# Altium PCB Beanbag.PcbDoc
Units mil, origin at the board's own origin, x right, y up, seen from the top; angles counter-clockwise.
Board outline 2060.03 x 1675.03 mil, 2 copper layers (Top Layer, Bottom Layer); 34 components, 21 nets, 104 pads, 29 vias.
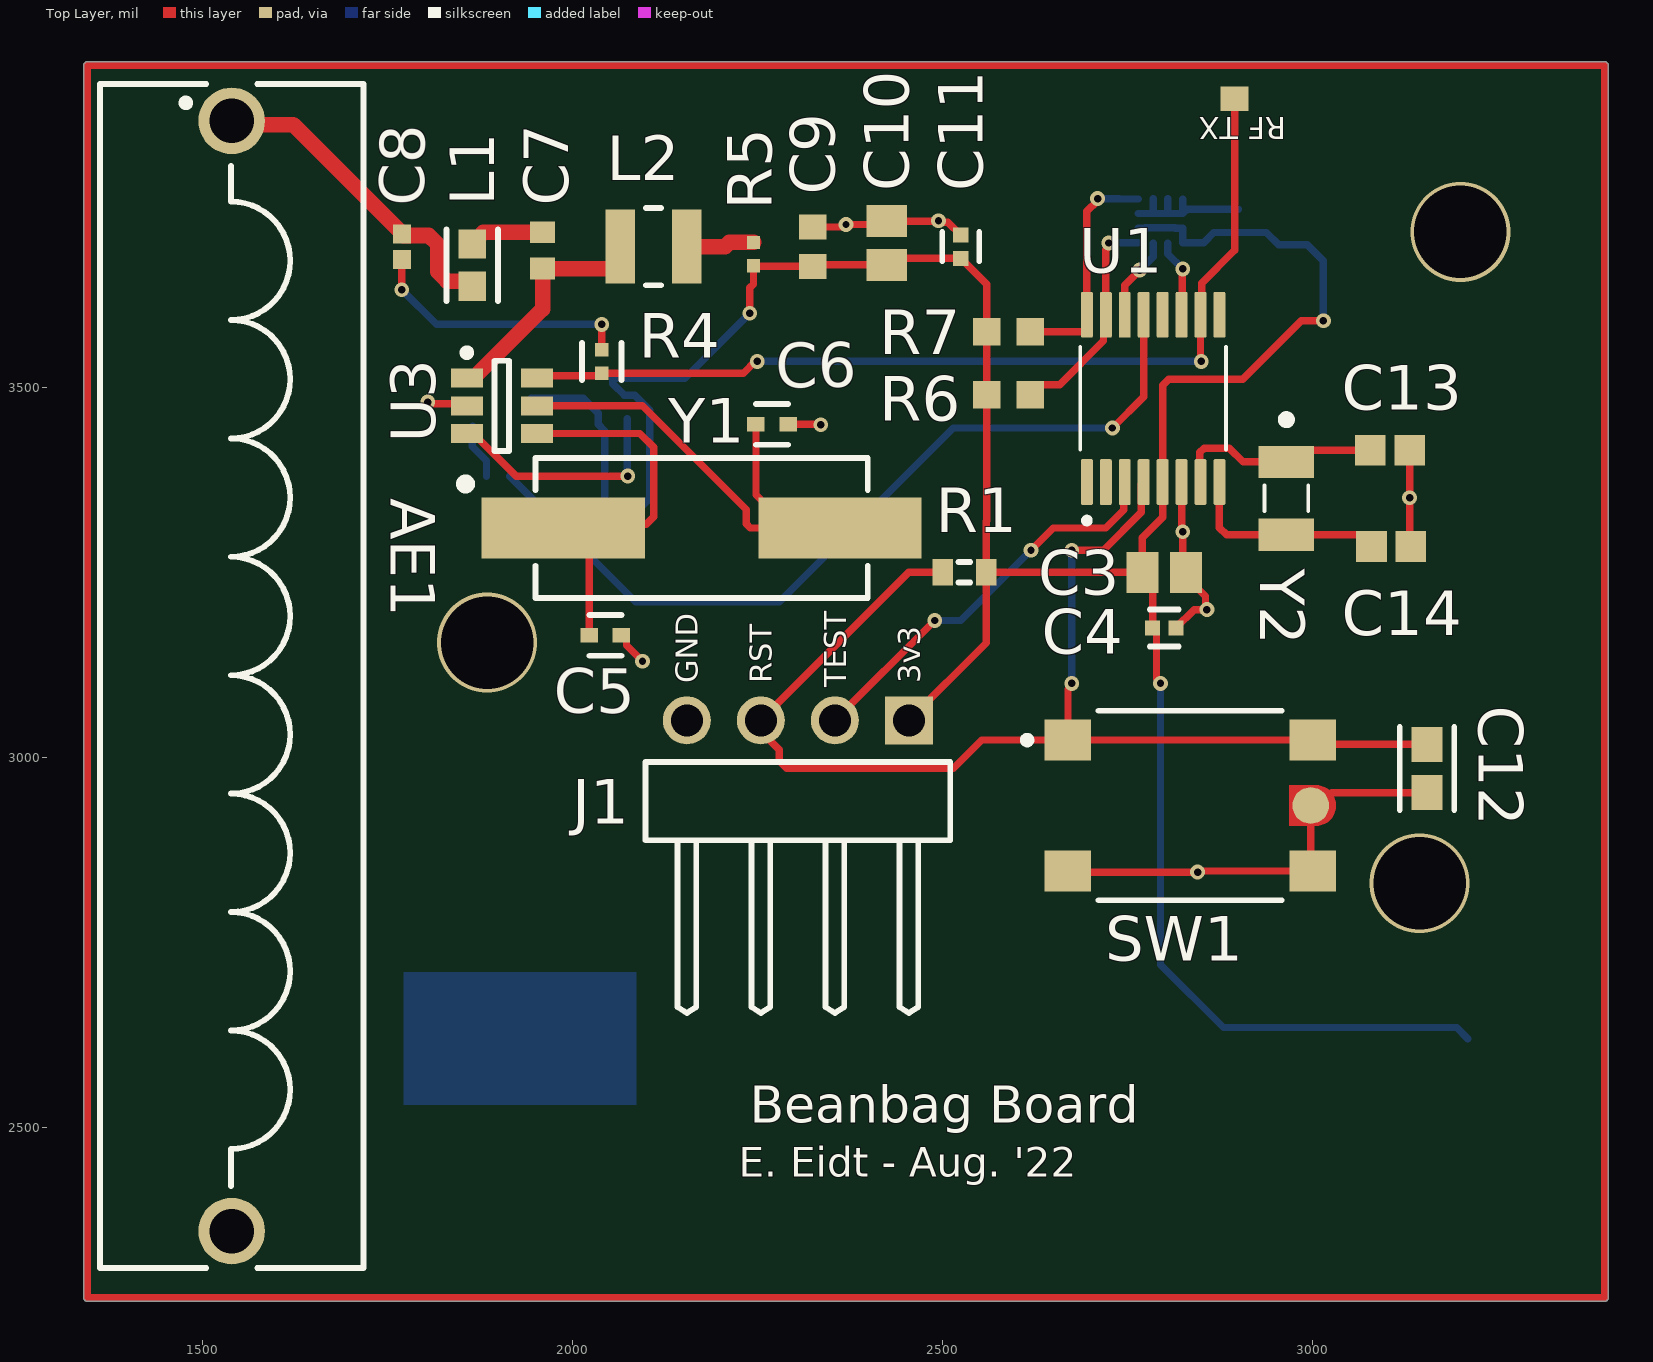
[diagram p0: Top Layer view]
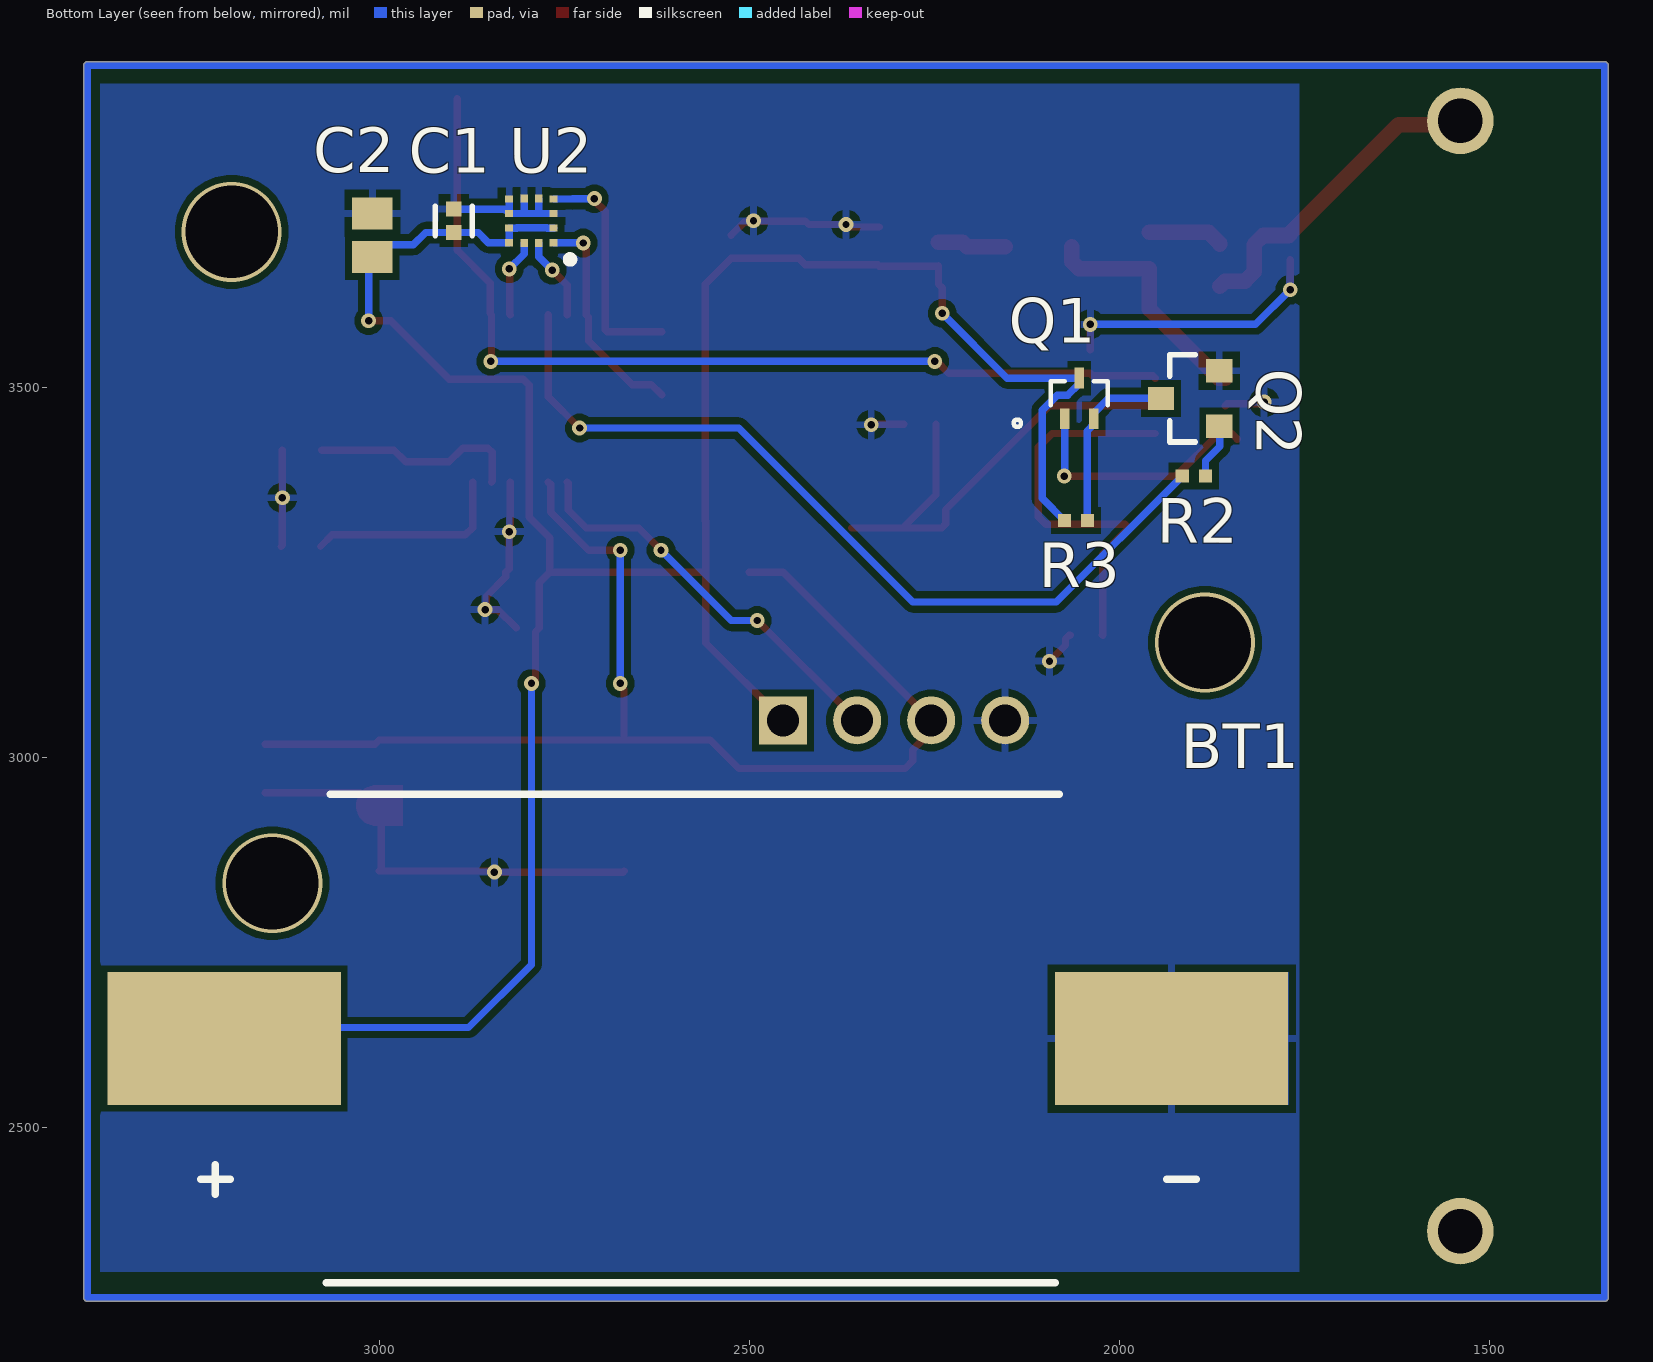
[diagram p1: Bottom Layer view, seen from below]
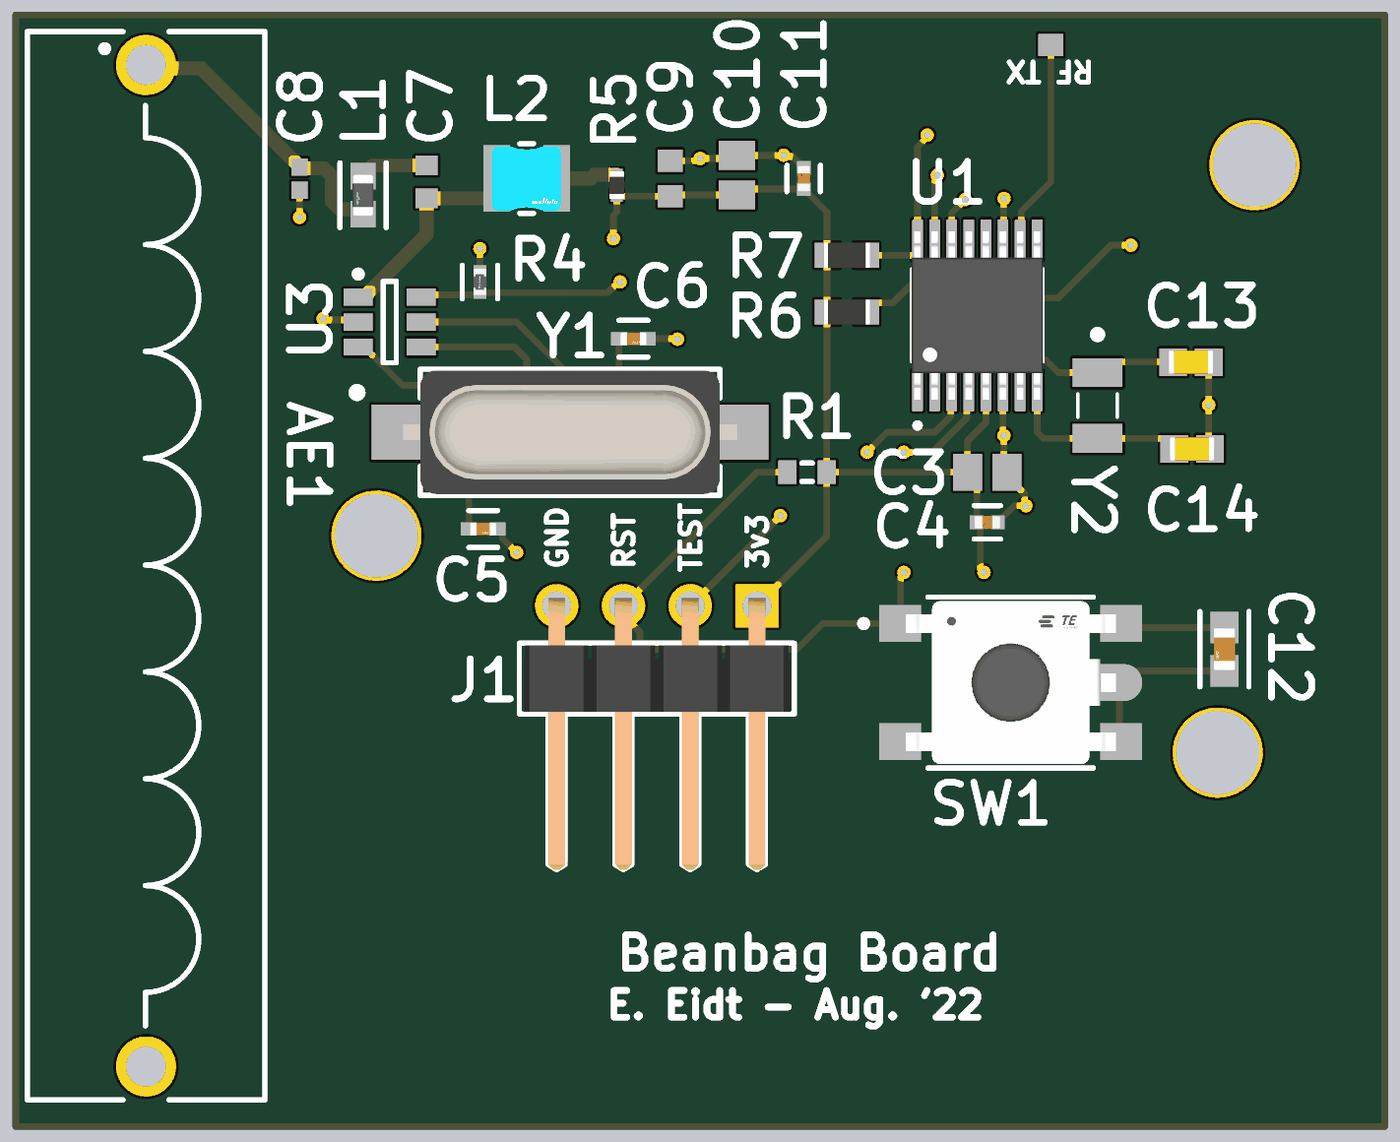
[diagram p2: 3D render of the assembled board from above, using the file's embedded part models]
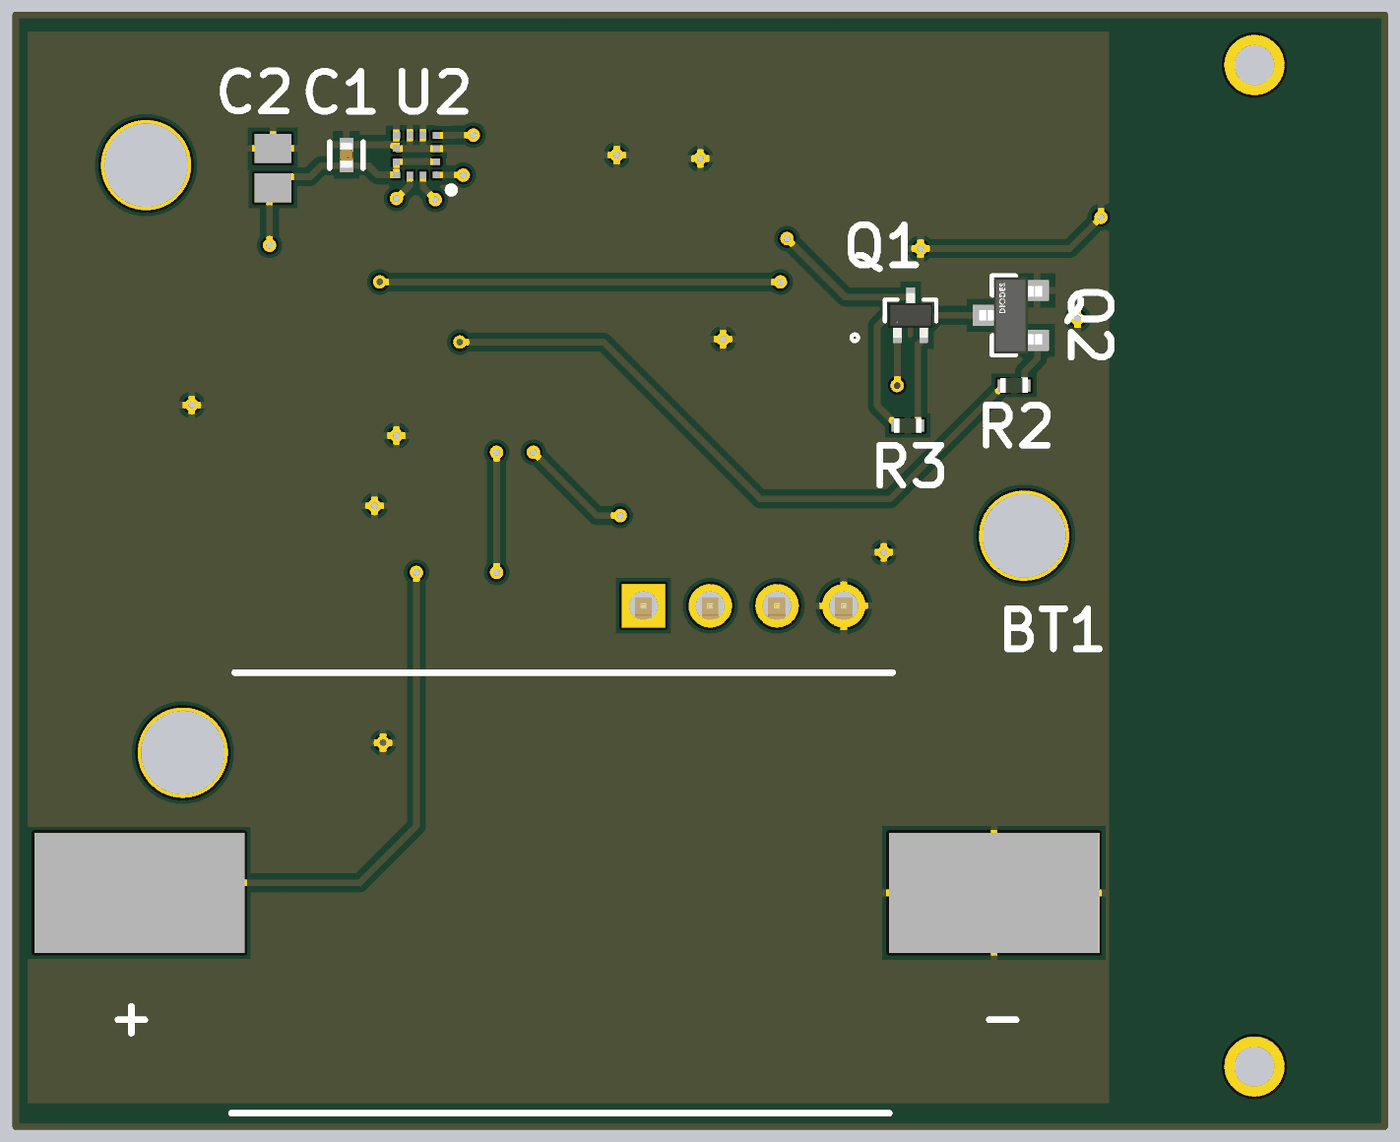
[diagram p3: 3D render of the assembled board from below, using the file's embedded part models]

## Layer stack, top to bottom
Top Solder: solder mask 0.4, Solder Resist, Dk 3.5
Top Layer: signal copper 1.4
Dielectric 1: dielectric 12.6, FR-4, Dk 4.8
Bottom Layer: signal copper 1.4
Bottom Solder: solder mask 0.4, Solder Resist, Dk 3.5

## Board outline
1345,2264.99 cw(c1345,2270) 1339.98,2270 1339.98,3935 cw(c1345,3935) 1345,3940.01 3395,3940.01 cw(c3395,3935) 3400.01,3935 3400.01,2270 cw(c3395,2270) 3395,2264.99

## Design rules (kind name [scope] priority, off if disabled: settings)
Clearance Clearance_1 [InNamedPolygon('GND_L02_P003')] p1: gap=5 ignorepadtopadclearanceinfootprint=FALSE except(0: Arc-Hole Track-Hole SMDPad-Hole THPad-Hole Via-Hole Fill-Hole Poly-Hole Region-Hole Text-Hole)
Clearance [All] p2: gap=9 ignorepadtopadclearanceinfootprint=FALSE except(0: Arc-Hole Track-Hole SMDPad-Hole THPad-Hole Via-Hole Fill-Hole Poly-Hole Region-Hole Text-Hole; 5: SMDPad-SMDPad; 10: Arc-Text Track-Text SMDPad-Text THPad-Text Via-Text Fill-Text Poly-Text Region-Text Text-Text)
MinimumSolderMaskSliver [All] p1: minsoldermaskwidth=0.5
PolygonConnect [All] p1: connectstyle=Relief reliefconductorwidth=10 reliefentries=4 polygonreliefangle="90 Angle" airgapwidth=10
RoutingVias [All] p1: holewidth=10 width=20 viastyle="Through Hole" minholewidth=8 minwidth=20 maxholewidth=28 maxwidth=50
SilkToSolderMaskClearance [IsPad] p1: minsilkscreentomaskgap=3 clearancetoexposedcopper=TRUE
SolderMaskExpansion [All] p1: expansion=4 istentingtop=FALSE
Width [InNetClass('RF')] p1: maxlimit=21.05 minlimit=21.05 preferedwidth=21.05 impedanceprofiledriven=TRUE impedanceprofileid={5821D3D1-2B05-429E-8024-41621388E1F3} impedanceprofilevalue=50.000000 minimp=50.000000 maximp=50.000000 favimp=50.000000
28 further rules are at their usual default settings.

## Classes and differential pairs
component class Radio: AE1 C5 C6 C7 C8 C9 C10 C11 L1 L2 Q1 Q2 R2 R3 R4 R5 U3
component class Power: BT1
component class Micro: C3 C4 C12 C13 C14 R1 SW1 U1 Y2
component class Connectors: J1
component class Accelerometer: C1 C2 R6 R7 U2

## Components (designator, comment, footprint, x,y, rotation, side; value= is the part's Value field where it differs from the comment)
AE1 "ANT-315-HETH" ANT-xxx-HETH 1540,3860 r270 top
BT1 "CR2032 Battery" PCBComponent_1 3367,2935 r180 bottom
C1 "100nF" FP-C0402-BB-MFG 2900,3725 r270 bottom value="0.10 μF"
C2 "10uF" C0805 3010,3705.47 r90 bottom
C3 "10uF" C0805 2800,3250 r0 top
C4 "100nF" FP-C0402-BB-MFG 2800,3175 r180 top value="0.10 μF"
C5 "18pF" FP-0402-L_1_0_1-W_0_5_0_1-MFG 2045,3165 r0 top
C6 "18pF" FP-0402-L_1_0_1-W_0_5_0_1-MFG 2270,3450 r0 top
C7 "10pF 50V" CAPC1608X90X35LL10T15 1960,3685 r90 top
C8 "6.8pF" CAPC1005X55X25NL05T10 1770,3690 r90 top
C9 "100pF" CAPC1608X90X35NL10T15 2325,3690 r270 top
C10 "10uF" C0805 2425,3695 r90 top
C11 "100nF" FP-C0402-BB-MFG 2525,3690 r90 top value="0.10 μF"
C12 "1nF" FP-0603-L_1_6_0_15-W_0_81-IPC_A 3155,2985 r270 top
C13 "10pF" CAPC1608X90X40ML10T20 3105,3415 r180 top
C14 "10pF" CAPC1608X90X40ML10T20 3106.57,3285 r180 top
J1 "61300411021" 61300411021 2305,2940.94 r0 top
L1 "150nH" FP-LQM18NN_00-IPC_B 1865,3665 r270 top
L2 "470nH" FP-LQW2UAS_00-MFG 2110,3690 r0 top
Q1 "MOSFET-P" SC89-3_0P95X1P7_ONS 2055,3485 r180 bottom
Q2 "FMMT491TA" FP-SOT23-MFG 1905,3485 r0 bottom
R1 "47K" J1-0603 2530,3250 r0 top
R2 "10K" RESC1005X40X25LL05T05 1900,3380 r180 bottom
R3 "10K" RESC1005X40X25LL05T05 2059.25,3320 r0 bottom
R4 "100K" FP-ERJ2RK-IPC_C 2040,3535 r90 top
R5 "0" RESC1005X40X25LL05T05 2245,3680 r270 top
R6 "4.7k" RESC1608X55X30NL15T15 2589.53,3490 r180 top
R7 "4.7k" RESC1608X55X30NL15T15 2589.53,3575 r180 top
SW1 "FSM1LP" FP-FSM1LP-MFG 2835,2935 r0 top
U1 "MSP430FR2311IPW16" SOP65P640X120-16N 2785,3485 r90 top
U2 "LIS2HH12TR" STM-LGA-12 2795,3725 r0 bottom
U3 "MICRF113YM6-TR" SOT23-6_N 1905,3475 r0 top
Y1 "9.8304MHZ" HC/49US-(AT49)_1 2175,3310 r0 top
Y2 "32kHz" XTAL_ECS-.327-6-34RR-TR 2965,3350 r270 top

## Footprints (in the part's own frame and the unit in brackets; to place one, negate y for a bottom-side part, rotate by r counter-clockwise, add the part's x,y. Pads: shape width x height; smd on the part's side, far side on the other; paste and mask are expansions set on the pad)
61300411021 [mm] "Pin Header, pitch 2.54 mm, THT, Angled, single row, 4p"
  rect 1.65x1.65 hole 1.1: 1(3.81,2.77)
  round 1.65 hole 1.1: 2(1.27,2.77) 3(-1.27,2.77) 4(-3.81,2.77)
  silkscreen extent -5.23,-7.27 5.23,1.35, body extent -5.08,-7.27 5.08,3.09, height 2.58
ANT-xxx-HETH [mil] "Antenna, Helical, 2-Lead, Thru-Hole, Body 1.5\"x0.35\""
  round 90 hole 60: 1(0,0) 2(1500,0)
  silkscreen extent -50,-178 1550,178, body extent 0,-175 1500,175, height 349
C0805 [mm] "Chip Capacitor, Body 2.0x1.3mm, IPC High Density"
  rect 1.1x1.4 smd: 1(-0.75,0) 2(0.75,0)
  body extent -1.1,-0.72 1.1,0.72, height 1.4
CAPC1005X55X25NL05T10 [mm] "Chip Capacitor, 2-Leads, Body 1.00x0.50mm, IPC Medium Density"
  rect 0.66x0.62 smd: 1(-0.44,0) 2(0.44,0)
  body extent -0.53,-0.28 0.53,0.27, height 0.55
CAPC1608X90X35LL10T15 [mm] "Chip Capacitor, 2-Leads, Body 1.60x0.80mm, IPC High Density"
  rect 0.75x0.85 smd: 1(-0.625,0) 2(0.625,0)
  body extent -0.85,-0.45 0.85,0.45, height 0.9
CAPC1608X90X35NL10T15 [mm] "Chip Capacitor, 2-Leads, Body 1.60x0.80mm, IPC Medium Density"
  rect 0.85x0.95 smd: 1(-0.675,0) 2(0.675,0)
  body extent -0.85,-0.45 0.85,0.45, height 0.9
CAPC1608X90X40ML10T20 [mm] "Chip Capacitor, 2-Leads, Body 1.7x0.9mm, IPC Low Density"
  rect 1.05x1.05 smd: 1(-0.675,0) 2(0.675,0)
  body extent -0.85,-0.45 0.85,0.45, height 0.9
FP-0402-L_1_0_1-W_0_5_0_1-MFG [mm]
  rect 0.6x0.5 smd paste+0 mask+0: 1(-0.55,0) 2(0.55,0)
  silkscreen extent -0.55,-0.7 0.55,0.7, body extent -0.95,-0.4 0.95,0.4, height 0.25
FP-0603-L_1_6_0_15-W_0_81-IPC_A [mil]
  rect 47.5x42.06 smd paste+0 mask+0: 1(-32.51,0) 2(32.51,0)
  silkscreen extent -56,-37 56,37, body extent -76,-41 76,41, height 10
FP-C0402-BB-MFG [mm]
  rect 0.52x0.52 smd paste+0 mask+0: 1(-0.4,0) 2(0.4,0)
  silkscreen extent -0.5,-0.64 0.5,0.64, body extent -0.5,-0.25 0.5,0.25, height 0.55
FP-ERJ2RK-IPC_C [mil]
  rect 18.43x18.6 smd paste+0 mask+0: 1(-15.83,0) 2(15.83,0)
  silkscreen extent -25,-27 25,27, body extent -29,-15 29,15, height 10
FP-FSM1LP-MFG [mm]
  rect 1.6x1.395 smd paste+0 mask+0: 1(-4.205,2.247) 2(4.205,2.247) 3(-4.205,-2.247) 4(4.205,-2.247)
  round 1.26 smd paste+0 mask+0: 5(4.139,0)
  Top Layer region: 3.405,0.7 4.307,0.7 4.574,0.647 4.801,0.496 4.952,0.269 5.005,0.002 5.005,0.002 5.005,-0.002 4.952,-0.269 4.801,-0.496 4.574,-0.647 4.307,-0.7 4.307,-0.7 3.405,-0.7
  silkscreen extent -5.72,-3.25 3.14,3.25, body extent -5.1,-3.35 5.11,3.35, height 0.25
FP-LQM18NN_00-IPC_B [mil]
  rect 39.63x37.73 smd paste+0 mask+0: 1(-28.58,0) 2(28.58,0)
  silkscreen extent -48,-35 48,35, body extent -58,-29 58,29, height 10
FP-LQW2UAS_00-MFG [mm]
  rect 1.015x2.54 smd paste+0 mask+0: 1(-1.142,0) 2(1.142,0)
  silkscreen extent -0.26,-1.33 0.26,1.33, body extent -1.75,-1.43 1.75,1.43, height 0.25
FP-SOT23-MFG [mm]
  rect 0.9x0.8 smd paste+0 mask+0: 1(-1,0.95) 2(-1,-0.95) 3(1,0)
  silkscreen extent -0.18,-1.5 0.7,1.5, body extent -1.2,-1.45 1.2,1.45, height 1.1
HC/49US-(AT49)_1 [mm]
  rect 5.6x2.1 smd: 1(-4.75,0) 2(4.75,0)
  silkscreen extent -8.23,-2.4 5.7,2.4, body extent -6.35,-2.35 6.35,2.35, height 4.2
J1-0603 [mm] "Chip Resistor, Body 1.6x0.8mm, IPC High Density"
  rect 0.7x0.9 smd: 1(-0.75,0) 2(0.75,0)
  silkscreen extent -0.2,-0.35 0.2,0.35, body extent -0.85,-0.48 0.85,0.48, height 0.9
PCBComponent_1 [mil]
  rect 315x180 smd: +(157,-315) -(1437,-315)
  Top Layer region: 1280,-225 1595,-225 1595,-405 1280,-405
  silkscreen extent 125,-645 1470,15
RESC1005X40X25LL05T05 [mm] "Chip Resistor, 2-Leads, Body 1.05x0.55mm, IPC High Density"
  rect 0.45x0.45 smd: 1(-0.4,0) 2(0.4,0)
  body extent -0.53,-0.28 0.53,0.28, height 0.4
RESC1608X55X30NL15T15 [mm] "Chip Resistor, 2-Leads, Body 1.75x0.95mm, IPC Medium Density"
  rect 0.95x0.95 smd: 1(-0.75,0) 2(0.75,0)
  body extent -0.87,-0.48 0.87,0.48, height 0.55
SC89-3_0P95X1P7_ONS [mil]
  rect 13x28 smd paste+0 mask+0: 1(-19.69,-27.5) 2(19.68,-27.5) 3(0,27.5)
  silkscreen extent -88,-38 38,24, body extent -34,-34 34,34, height 34
SOP65P640X120-16N [mm]
  rrect25% 1.57x0.41 smd: 1(-2.87,2.275) 2(-2.87,1.625) 3(-2.87,0.975) 4(-2.87,0.325) 5(-2.87,-0.325) 6(-2.87,-0.975) 7(-2.87,-1.625) 8(-2.87,-2.275) 9(2.87,-2.275) 10(2.87,-1.625) 11(2.87,-0.975) 12(2.87,-0.325) 13(2.87,0.325) 14(2.87,0.975) 15(2.87,1.625) 16(2.87,2.275)
  silkscreen extent -4.29,-2.5 1.76,2.5, body extent -3.2,-2.5 3.2,2.5, height 1.2
SOT23-6_N [mm] "SOT23, 6-Leads, Body 2.9x1.6mm, Pitch 0.95mm, Lead Span 2.7mm, IPC Medium Density"
  rect 1.1x0.65 smd: 1(-1.2,0.95) 2(-1.2,0) 3(-1.2,-0.95) 4(1.2,-0.95) 5(1.2,0) 6(1.2,0.95)
  silkscreen extent -1.32,-1.55 0.25,1.95, body extent -0.9,-1.55 0.9,1.55, height 1.45
STM-LGA-12 [mm] "LGA, 12-Leads, Body 2x2mm, Pitch 0.5mm"
  rect 0.275x0.25 smd: 1(-0.763,0.75) 2(-0.763,0.25) 3(-0.763,-0.25) 4(-0.763,-0.75) 7(0.763,-0.75) 8(0.763,-0.25) 9(0.763,0.25) 10(0.763,0.75)
  rect 0.25x0.275 smd: 5(-0.25,-0.763) 6(0.25,-0.763) 11(0.25,0.763) 12(-0.25,0.763)
  silkscreen extent -1.45,1.2 -1.2,1.45, body extent -1,-1 1,1, height 1
XTAL_ECS-.327-6-34RR-TR [mm]
  rect 1.1x1.9 smd: 1(-1.25,0) 2(1.25,0)
  silkscreen extent -2.84,-0.75 0.44,0.75

## Part data
AE1: library part CMP-0172-00019-1, "Embeddable 1/4-wave Monopole Antenna, HE Series, 315MHz, Thru-Hole", DatasheetVersion=Feb-2002, PackageDescription="Helical Antenna, HE Series, Thru-Hole, 2-Lead, 1.5\" x 0.35\" Body", PackageReference=ANT-xxx-HETH, PackageVersion=Feb-2002
BT1: library part Battery, "Multicell Battery", Supplier Part Number 1=2057-BH-49E-5-BK-ND, LatestRevisionDate=17-Jul-2002, LatestRevisionNote="Re-released for DXP Platform.", PackageDescription="Battery; 2 Leads", PackageReference=BAT-2, Published=24-Mar-1999, Publisher="Altium Limited", Supplier 1=Digi-Key
C1 C4 C11: library part CMP-2008-02046-2, "CAP CER 0.1UF 10V X5R 0402", Capacitance="0.10 μF", Manufacturer=Kemet, Manufacturer Part Number=C0402C104K8PACTU, Package=C0402-BB, Temperature="-55°C to +125°C", Temperature Characteristic=X5R, Temperature Coefficient=15%, Temperature Range High=+125°C, Temperature Range Low=-55°C, Tolerance=0.1, Voltage Rating="10 V", Automotive=No, Category=Cap, ComponentLink2Description=Datasheet, ComponentLink2URL=https://content.kemet.com/datasheets/KEM_C1002_X7R_SMD.pdf, Device Class L1="Passive Components", Device Class L2=Capacitors, Device Class L3="Ceramic Capacitors", Digikey Description="CAP CER 0.1UF 10V X5R 0402", Height=0.55mm, Ipc Land Pattern Name=CAPC10050X50, Lead Free=Yes, Material=Ceramic, Mouser Description="Capacitor 100 nF 10 VDC 0402", Octopart=https://octopart.com/c0402c104k8pactu-kemet-140039, RoHS=TRUE
C2 C3 C10: library part "Cap Pol3", "Alum. Electrolytic Cap 10µF 50V; 5mm Surface Mount; Lifetime 2000h; +105°C", Case/Package=Radial, Manufacturer="Wurth Electronics", Manufacturer Part Number=865080642006, Max Operating Temperature=105°C, Min Operating Temperature=-55°C, Package Quantity=1, Ripple Current=95mA, Supplier Part Number 1=8391862P, Tolerance=20%, Voltage Rating=50V, Capacitance=10uF, Category="Aluminum Electrolytic Capacitors", ComponentLink1Description=http://www.farnell.com/datasheets/1880176.pdf?src-supplier=Farnell, ComponentLink1URL=http://www.farnell.com/datasheets/1880176.pdf?src-supplier=Farnell, ComponentLink2Description=http://www.farnell.com/datasheets/1880176.pdf?src-supplier=Element14, ComponentLink2URL=http://www.farnell.com/datasheets/1880176.pdf?src-supplier=Element14, ComponentLink3Description=http://www.farnell.com/datasheets/1880176.pdf?src-supplier=Newark, ComponentLink3URL=http://www.farnell.com/datasheets/1880176.pdf?src-supplier=Newark, ComponentLink4Description=http://katalog.we-online.de/pbs/datasheet/865080642006.pdf?src-supplier=Digi-Key, ComponentLink4URL=http://katalog.we-online.de/pbs/datasheet/865080642006.pdf?src-supplier=Digi-Key, ComponentLink5Description=https://katalog.we-online.de/pbs/datasheet/865080642006.pdf?src-supplier=Digi-Key, ComponentLink5URL=https://katalog.we-online.de/pbs/datasheet/865080642006.pdf?src-supplier=Digi-Key, Diameter=5mm, Height=5.5mm, Height - Seated (Max)=0.217inch, Impedance=2.8R, LatestRevisionDate=29-May-2009, LatestRevisionNote="IPC-7351 Footprint Added.", Life (Hours)=2000Hour, Mount="Surface Mount", PackageDescription="Chip Capacitor", PackageReference=C0805, Packaging="Cut Tape", Polarity=Polar, Pricing 1="25=0.20400 (USD)", Published=8-Jun-2000, Publisher="Altium Limited", REACH SVHC=Unknown, Ripple Current (AC)=95mA, RoHS=Yes, RoHS Compliant=Yes, Stock 1=1, Supplier 1=RSComponents, Voltage Rating (DC)=50V
C5 C6: library part CMP-1034-00865-3, "General Purpose Ceramic Capacitor, 0402, 18pF, 5%, C0G, 30ppm/°C, 50V", Case Code (Imperial)=0402, Case Code (Metric)=1005, Dielectric=C0G, Dielectric Material=Ceramic, Insulation Resistance=100GR, Max Operating Temperature=125°C, Min Operating Temperature=-55°C, Package Quantity=1, Temperature Coefficient=0ppm/°C, Tolerance=5%, Voltage=50V, Capacitance=18pF, Case/Package=0402, Contact Plating=Tin, Depth=0.5mm, Height=0.5mm, Lead Free="Lead Free", Length=1mm, Mount="Surface Mount", Number of Pins=2, Packaging="Tape and Reel", Radiation Hardening=No, REACH SVHC="No SVHC", RoHS Compliant=Yes, Termination=SMD/SMT, Thickness=0.022inch, Voltage Rating=50V, Voltage Rating (DC)=50V, Width=0.02inch
C7: library part CMP-2006-02592-1, Manufacturer=Murata, Part Number=GRM1885C1H100JA01D, Supplier Part Number 1=490-1403-1-ND, Supplier 1=Digi-Key
C8: library part CMP-2008-04424-1, Manufacturer=Murata, Part Number=GRM1555C1H6R8DA01D
C9: library part CMP-2006-02595-1, Manufacturer=Murata, Part Number=GRM1885C1H101JA01D, Supplier Part Number 1=490-1427-6-ND, Supplier 1=Digi-Key
C12: library part CMP-2006-04378-2, "General Purpose Ceramic Capacitor, 0603, 1nF, 10%, X7R, 15%, 50V", Case Code (Imperial)=0603, Case Code (Metric)=1608, Dielectric=X7R, Dielectric Material=Ceramic, Max Operating Temperature=125°C, Min Operating Temperature=-55°C, Package Quantity=4000, Supplier Part Number 1=06035C102KAT2A, Tolerance=10%, Voltage=50V, Capacitance=1nF, Case/Package=0603, Construction=Flat, Contact Plating=Tin, Depth=0.81mm, Height=0.9mm, Lead Free="Lead Free", Length=1.6mm, Mount="Surface Mount", Number of Pins=2, Packaging="Tape and Reel", Radiation Hardening=No, REACH SVHC="No SVHC", RoHS Compliant=Yes, Series=-, Supplier 1="Arrow Electronics", Termination=SMD/SMT, Thickness=0.035inch, Voltage Rating=50V, Voltage Rating (DC)=50V, Weight=7.1E-05oz, Width=0.032inch
C13 C14: library part CMP-2100-03593-1, "Chip Capacitor, 10 pF, +/- 5%, 50 V, -55 to 125 degC, 0603 (1608 Metric), RoHS, Tape and Reel", Case Code (Imperial)=0603, Case Code (Metric)=1608, Dielectric=C0G, Insulation Resistance=100GR, Manufacturer=Yageo, Max Operating Temperature=125degC, Min Operating Temperature=-55degC, Package Description="2-Pin Surface Mount Device, Body 1.6 x 0.8 mm", Package Quantity=1, Supplier Part Number 1=CC0603JRNPO9BN100, Temperature Coefficient=30ppm/degC, Tolerance=5%, Voltage=50V, Capacitance=10pF, Case/Package=0603, Composition=Ceramic, Datasheet URL=http://www.yageo.com/documents/recent/UPY-GP_NP0_16V-to-50V_14.pdf, Datasheet Version="Rev. 14, 07/2016", Depth=0.8mm, Height=0.8mm, Lead Free=LeadFree, Length=1.6mm, Manufacturer URL=http://www.yageo.com/, Mount=SurfaceMount, Number of Pins=2, Package Reference=0603, Packaging=TapeandReel, Radiation Hardening=No, REACH SVHC=NoSVHC, RoHSCompliant=True, Supplier 1="Arrow Electronics", Termination=SMD/SMT, Thickness=0.035inch, Voltage Rating=50V, Voltage Rating (DC)=50V, Width=0.031inch
J1: library part CMP-1502-01063-1, "THT Angled Pin Header WR-PHD, Pitch 2.54 mm, Single Row, 4 pins", Contact Resistance=20mOhm, Manufacturer="Wurth Elektronik", Operating Temperature=-40to105degC, Rated Current=3A, Withstanding Voltage=500VAC, Working Voltage=250VAC, Datasheet URL=https://katalog.we-online.de/em/datasheet/6130xx11021.pdf, Gender=Male, Manufacturer URL=http://www.we-online.de, Mounting Technology=THT, Orientation=Angled, Package Reference=61300411021, Packaging=Bag, Part Number=61300411021, Pin Number=4, Pitch=2.54mm, Publisher=WurthElektronik, Row Number=Single
L1: library part CMP-06042-016466-1, "Multilayer Type Inductor for General Circuits, 0603 (1608), 150nH, 10%, 0.6Ω, 50mA", Case Code (Imperial)=0603, Case Code (Metric)=1608, Current Rating=50mA, DC Resistance (DCR)=600mR, Inductance Tolerance=10%, Inductor Type=MONOLITHIC, Max Operating Temperature=85°C, Min Operating Temperature=-40°C, Package Quantity=4000, Self Resonant Frequency=180MHz, Supplier Part Number 1=490-4033-1-ND, Test Frequency=25MHz, Case/Package=0603, Core Material=Ferrite, DC Current=50mA, Depth=0.95mm, Height=0.8mm, Height - Seated (Max)=0.035inch, Inductance=150nH, Lead Free="Lead Free", Length=1.6mm, Max DC Current=50mA, Military Standard=Not, Mount="Surface Mount", Number of Pins=2, Packaging="Tape and Reel", Q Factor=15, REACH SVHC="No SVHC", Series=LQM18N, Shielding=Shielded, Supplier 1=Digi-Key, Termination=SMD/SMT, Tolerance=10%, Width=0.8mm
L2: library part CMP-06042-015512-1, "Wire Wound RF Inductor 470nH ±5% 470mA 1.19Ω 1008 (2520)", Case Code (Imperial)=1008, Case Code (Metric)=2520, Current Rating=470mA, DC Resistance (DCR)=1.19R, Inductance Tolerance=5%, Max Operating Temperature=125°C, Min Operating Temperature=-55°C, Package Quantity=2000, Resistor Type=Wirewound, Self Resonant Frequency=450MHz, Supplier Part Number 1=490-5699-6-ND, Test Frequency=25MHz, Case/Package=1008, Core Material=Air, Depth=2.65mm, Height=1.83mm, Height - Seated (Max)=0.08inch, Inductance=470nH, Lead Free="Lead Free", Length=0.103inch, Max DC Current=470mA, Mount="Surface Mount", Packaging="Tape and Reel", Q Factor=45, Radiation Hardening=No, REACH SVHC="No SVHC", Series=LQW2UA, Shielding=Unshielded, Supplier 1=Digi-Key, Termination=SMD/SMT, Tolerance=5%, Weight=0.001376oz, Width=0.096inch
Q1: "Single P-Channel 20 V 1.2 Ohm Surface Mount Power Mosfet - SC-89", Case/Package=SC, Continuous Drain Current (ID)=350mA, Drain to Source Breakdown Voltage=-20V, Drain to Source Resistance=1.2R, Drain to Source Voltage (Vdss)=20V, Gate to Source Voltage (Vgs)=6V, Manufacturer="Vishay Siliconix", Manufacturer Part Number=SI1013X-T1-GE3, Max Operating Temperature=150°C, Max Power Dissipation=250mW, Min Operating Temperature=-55°C, Package Quantity=1, Supplier Part Number 1=SI1013X-T1-GE3CT-ND, Threshold Voltage=-450mV, Category=MOSFETs, ComponentLink1Description=https://datasheet.ciiva.com/22671/1825082-22671731.pdf?src-supplier=Element14, ComponentLink1URL=https://datasheet.ciiva.com/22671/1825082-22671731.pdf?src-supplier=Element14, ComponentLink2Description=https://datasheet.ciiva.com/931/71167-931890.pdf?src-supplier=Digi-Key, ComponentLink2URL=https://datasheet.ciiva.com/931/71167-931890.pdf?src-supplier=Digi-Key, ComponentLink3Description=https://datasheet.ciiva.com/931/71167-931891.pdf?src-supplier=Digi-Key, ComponentLink3URL=https://datasheet.ciiva.com/931/71167-931891.pdf?src-supplier=Digi-Key, ComponentLink4Description=https://datasheet.ciiva.com/931/71167-931892.pdf?src-supplier=Digi-Key, ComponentLink4URL=https://datasheet.ciiva.com/931/71167-931892.pdf?src-supplier=Digi-Key, ComponentLink5Description=https://datasheet.ciiva.com/11161/71167-11161420.pdf?src-supplier=Avnet, ComponentLink5URL=https://datasheet.ciiva.com/11161/71167-11161420.pdf?src-supplier=Avnet, ComponentLink6Description=https://datasheet.ciiva.com/16217/71167-16217575.pdf?src-supplier=Future+Electronics, ComponentLink6URL=https://datasheet.ciiva.com/16217/71167-16217575.pdf?src-supplier=Future+Electronics, Drain-source On Resistance-Max=1.2R, Element Configuration=Single, Fall Time=9ns, Height=0.8mm, LatestRevisionDate=17-Jul-2002, LatestRevisionNote="Re-released for DXP Platform.", Lead Free="Lead Free", Length=1.7mm, Mount="Surface Mount", Number of Channels=1, Number of Elements=1, Number of Pins=3, On-State Resistance=1.2R, PackageDescription="TO, Flat Index; 3 In-Line, Axial Leads; Body Dia. 4.6mm; Lead Dia. 0.5 mm (max)", PackageReference=E3, PackageVersion=1995/1996, Packaging="Tape and Reel", Polarity=P-CHANNEL, Power Dissipation=250mW, Pricing 1="1=0.46000, 10=0.39200, 100=0.29260, 500=0.22990, 1000=0.17765 (USD)", Published=8-Jun-2000, Publisher="Altium Limited", Radiation Hardening=No, Rds On Max=1.2R, REACH SVHC=Unknown, Rise Time=9ns, RoHS=Yes, RoHS Compliant=Yes, Series=TrenchFET®, Stock 1=2646, Supplier 1=Digi-Key, Turn-Off Delay Time=35ns, Turn-On Delay Time=5ns, Weight=0.001058oz, Width=0.95mm
Q2: library part CMP-12798-000044-1, "TRANS NPN 60V 1A SOT23-3", Case/Package=SOT-23, Collector Base Voltage (VCBO)=80V, Collector Emitter Breakdown Voltage=60V, Collector Emitter Saturation Voltage=160mV, Continuous Collector Current=1A, Emitter Base Voltage (VEBO)=5V, Frequency=150MHz, Max Operating Temperature=150°C, Max Power Dissipation=500mW, Min Operating Temperature=-55°C, Package Quantity=3000, Supplier Part Number 1=0274879P, Collector Emitter Voltage (VCEO)=60V, Current Rating=1A, Element Configuration=Single, Gain Bandwidth Product=150MHz, Height=1.02mm, hFE Min=100, Lead Free="Lead Free", Length=3.04mm, Max Breakdown Voltage=60V, Max Collector Current=1A, Max Frequency=150MHz, Mount="Surface Mount", Number of Elements=1, Number of Pins=3, Packaging="Tape and Reel", Polarity=NPN, Power Dissipation=500mW, Radiation Hardening=No, REACH SVHC="No SVHC", Supplier 1=RSComponents, Termination=SMD/SMT, Transition Frequency=150MHz, Voltage Rating (DC)=60V, Weight=0.000282oz, Width=1.4mm
R1: library part Res1, "Resistor", LatestRevisionDate=17-Jul-2002, LatestRevisionNote="Re-released for DXP Platform.", PackageDescription="Axial Device, Thru-Hole; 2 Leads; 0.3 in Pin Spacing", PackageReference=AXIAL-0.3, Published=8-Jun-2000, Publisher="Altium Limited"
R2 R3: library part CMP-2000-07588-1, "Chip Resistor, 10 KOhm, +/- 1%, 0.1 W, -55 to 155 degC, 0402 (1005 Metric), RoHS, Tape and Reel", Case Code (Imperial)=0402, Case Code (Metric)=1005, Manufacturer=Panasonic, Max Operating Temperature=155degC, Max Power Dissipation=100mW, Min Operating Temperature=-55degC, Package Description="2-Pin Surface Mount Device, Body 1 x 0.5 mm", Package Quantity=1, Package Reference=402, Resistance=10KOhm, Temperature Coefficient=100ppm\/degreesC, Tolerance=1%, Voltage Rating=50V, Case\/Package=0402, Composition=ThickFilm, Contact Plating=Tin, Datasheet URL=https://industrial.panasonic.com/cdbs/www-data/pdf/RDA0000/AOA0000C304.pdf, Datasheet Version=02/2017, Depth=0.5mm, Height=0.35mm, Lead Free=LeadFree, Length=1mm, Manufacturer URL=http://www.panasonic.com/, Military Standard=Not, Mount=SurfaceMount, Mounting Technology=SurfaceMount, Number of Pins=2, Number of Terminations=2, Packaging=TapeandReel, Power Rating=100mW, Radiation Hardening=No, REACH SVHC=NoSVHC, RoHSCompliant=True, Termination=SMD/SMT, Voltage Rating (DC)=50V, Width=0.02inch
R4: library part CMP-2002-00608-4, "RES SMD 100K OHM 1% 1/10W 0402", Case Code (Imperial)=0402, Case Code (Metric)=1005, Max Operating Temperature=155°C, Max Power Dissipation=100mW, Min Operating Temperature=-55°C, Package Quantity=1, Resistance=100kR, Supplier Part Number 1=ERJ-2RKF1003X, Temperature Coefficient=100ppm/°C, Tolerance=1%, Voltage Rating=50V, Case/Package=0402, Composition="Thick Film", Contact Plating=Tin, Depth=0.5mm, Features="Automotive AEC-Q200", Height=0.35mm, Lead Free="Lead Free", Length=1mm, Military Standard=Not, Mount="Surface Mount", Number of Pins=2, Number of Terminations=2, Packaging="Tape and Reel", Power Rating=100mW, Radiation Hardening=No, REACH SVHC="No SVHC", Supplier 1="Arrow Electronics", Termination=SMD/SMT, Voltage Rating (DC)=50V, Width=0.5mm
R5: library part CMP-2000-07451-1, "Chip Resistor, 0 Ohm, 0.1 W, -55 to 155 degC, 0402 (1005 Metric), RoHS, Tape and Reel", Case Code (Imperial)=0402, Case Code (Metric)=1005, Manufacturer=Panasonic, Max Operating Temperature=155degC, Max Power Dissipation=100mW, Min Operating Temperature=-55degC, Package Description="2-Pin Surface Mount Device, Body 1 x 0.5 mm", Package Quantity=1, Package Reference=402, Resistance=0mOhm, Supplier Part Number 1=P0.0JCT-ND, Temperature Coefficient=600ppm/��C, Tolerance=5%, Voltage Rating=50V, Case/Package=0402, Composition=ThickFilm, Contact Plating=Tin, Datasheet URL=https://industrial.panasonic.com/cdbs/www-data/pdf/RDA0000/AOA0000C301.pdf, Datasheet Version=03/2015, Depth=0.5mm, Height=0.35mm, Lead Free=LeadFree, Length=1mm, Manufacturer URL=http://www.panasonic.com/, Military Standard=Not, Mount=SurfaceMount, Mounting Technology=SurfaceMount, Number of Terminations=2, Packaging=TapeandReel, Power Rating=100mW, Radiation Hardening=No, REACH SVHC=NoSVHC, RoHSCompliant=True, Supplier 1=Digi-Key, Termination=SMD/SMT, Voltage Rating (DC)=50V, Width=0.02inch
R6 R7: library part CMP-1012-00586-3, "Precision Thick Film Chip Resistor, 4.7 KOhm, +/- 1%, -55 to 155 degC, 0603 (1608 Metric), RoHS, Tape and Reel", Case Code (Imperial)=1206, Case Code (Metric)=3216, Case\Package=1205, Max Operating Temperature="125 degC", Min Operating Temperature="-55 degC", Package Quantity=1, Power Rating="250 mW", Resistance="220 Ohm", Supplier Part Number 1=P4.70KHCT-ND, Tolerance=5%, Type (Resistor)="Thick Film", Voltage Rating="50 V", ComponentLink1Description="Manufacturer URL", ComponentLink1URL=http://www.panasonic.com/, ComponentLink2Description=Datasheet, ComponentLink2URL=http://industrial.panasonic.com/cdbs/www-data/pdf/RDA0000/AOA0000C86.pdf, DatasheetVersion=Apr-15, Elements=4, Height="0.024 inch", Length="0.126 inch", Mount="Surface Mount", PackageDescription="2-Pin Surface Mount Device, Body 1.6 x 0.85 mm", PackageReference=0603, Packaging="Tape and Reel", Pins=8, Radiation Hardening=No, REACH SVHC="No SVHC", RoHSCompliant=true, Supplier 1=Digi-Key, Width="0.063 inch"
SW1: library part CMP-03402-000015-1, "SWITCH TACTILE SPST-NO 0.05A 24V", Actuator Color=Black, Contact Current Rating=50mA, Contact Resistance=100mR, Max Operating Temperature=85°C, Max Voltage Rating (DC)=12V, Min Operating Temperature=-35°C, Operating Force=1.57N, Package Quantity=2000, Actuator Length=0.01inch, Actuator Material=Polyphthalamide, Actuator Type=Standard, Contact Material="Copper Alloy", Contact Plating=Silver, Current Rating=50mA, Depth=8mm, Electrical Life=100000Cycles, ELV=Compliant, Illumination Type=Non-Illuminated, Lead Free="Lead Free", Length=6.19mm, Max Current Rating=50mA, Mechanical Life=100000Cycles, Mount="Surface Mount", Orientation=Straight, Packaging="Loose Piece", REACH SVHC="No SVHC", RoHS Compliant=Yes, Series=FSM1LP, Supplier 1="Arrow Electronics", Supplier Part Number 1=FSM1LP, Switch Function=Off-Mom, Switch Travel=0.25mm, Termination="Gull Wing", Throw Configuration=SPST, Type=Switch, Voltage Rating (DC)=12V
U1: "16MHz integrated analog microcontroller with 3.75KB FRAM, Op-Amp, TIA, Comparator w/ DAC, 10-bit ADC 16-TSSOP -40 to 85", Package="TSSOP-16 Texas Instruments", Availability="In Stock", Check_prices=https://www.snapeda.com/parts/MSP430FR2311IPW16/Texas+Instruments/view-part/?ref=eda, MF="Texas Instruments", MP=MSP430FR2311IPW16, Price=None, Purchase-URL=https://pricing.snapeda.com/search/part/MSP430FR2311IPW16/?ref=eda, SnapEDA_Link=https://www.snapeda.com/parts/MSP430FR2311IPW16/Texas+Instruments/view-part/?ref=snap
U2: library part CMP-2000-07462-1, "MEMS Digital Output Motion Sensor: Ultra-Low-Power High-Performance 3-Axis \"Pico\" Accelerometer, 1.71 to 3.6 V, -40 to 85 degC, 12-Pin LGA, RoHS, Tape and Reel", Case\/Package=LGA, Manufacturer=STMicroelectronics, Max Operating Temperature=85degC, Min Operating Temperature=-40degC, Package Description="12-Pin Land Grid Array Package, Body 2 x 2 mm, Pitch 0.5 mm", Package Reference=LGA-12, Bandwidth=400Hz, Contact Plating=Gold, Datasheet URL=http://www.st.com/content/ccc/resource/technical/document/datasheet/c9/16/f2/79/ca/31/47/89/DM00096789.pdf/files/DM00096789.pdf/jcr:content/translations/en.DM00096789.pdf, Datasheet Version="Rev. 5, 12/2015", Lead Free=LeadFree, Manufacturer URL=http://www.st.com/, Mount=SurfaceMount, Mounting Technology=SurfaceMount, Number of Pins=12, Packaging=TapeandReel, RoHSCompliant=true
U3: "No Description Available", Mfr_Name=Microchip, Copyright="Copyright (C) 2022 Ultra Librarian. All rights reserved.", Digi-Key_Part_Number_1=576-3229-1-ND, Digi-Key_Part_Number_2=576-3229-2-ND, Digi-Key_Part_Number_3=576-3229-2-NDL, Digi-Key_Part_Number_4=576-3229-6-ND, Manufacturer_Part_Number=MICRF113YM6-TR, RefDes=RefDes, Type=DEV
Y1: library part ABLS2-16.000MHZ-D4Y-T, "Crystal or Oscillator", Manufacturer_Name=ABRACON, Mouser Part Number=815-ABLS2-16-D4Y-T, Arrow Part Number=ABLS2-16.000MHZ-D4Y-T, Arrow Price/Stock=https://www.arrow.com/en/products/abls2-16.000mhz-d4y-t/abracon?region=nac, Datasheet Link=https://abracon.com/Resonators/ABLS2.pdf, Manufacturer_Part_Number=ABLS2-16.000MHZ-D4Y-T, Mouser Price/Stock=https://www.mouser.co.uk/ProductDetail/ABRACON/ABLS2-16.000MHZ-D4Y-T?qs=LoTOQoUkC8S5C2377M50iA%3D%3D
Y2: library part ECS-.327-6-34RR-TR, "32.768kHz Â±20ppm Crystal 6pF 40 kOhms 2-SMD, No Lead", Package="SMD-2 TE Connectivity", Supplier Part Number 1=XC2296CT-ND, Digi-Key_Part_Number=XC2296CT-ND, DigiKey-Purchase-URL=https://snapeda.com/shop?store=DigiKey&id=2047718, MF="ECS Inc.", MP=ECS-.327-6-34RR-TR, SnapEDA_Link=https://www.snapeda.com/parts/ECS-.327-6-34RR-TR/ECS%20Inc./view-part/2047718/?ref=snap, Supplier 1=Digi-Key

## Free pads (board coordinates)
  rect 37.4x33.46 smd: 4(2895,3890)

## Via types
v1: diameter 20, hole 10, Top Layer to Bottom Layer, 26 vias
v2: diameter 135, hole 125, Top Layer to Bottom Layer, 3 vias

## Nets (pads, with @x,y where several pads share a name; then routed paths per layer and width w, separated by ;. In a path a pad name is that pad's centre, name@x,y a point inside that pad or via, vN(x,y) a via of type N, cw(c..) or ccw(c..) an arc to the next point about the centre after c; other vN are vias at no path point)
+3V: BT1.+ C1.2 C2.1 C3.1 C4.2 C9.2 C10.1 C11.1 J1.1 Q1.3 R1.2 R3.2 R5.2 R6.2 R7.2 U1.5 U2.2 U2.9 U2.10 | length 3585.8
  Top Layer w10: v1(2240,3600) 2240,3634.44 2245,3639.44 R5.2 2245.83,3663.43 C9.2 2327.05,3665.47 C10.1 2433.78,3674.25 C11.1 2560,3639.25 R7.2 R6.2 2560,3319.41 2559.53,3318.94 R1.2 ; J1.1 2559.53,3154.53 R1.2 ; v1(2795,3100) 2789.49,3105.51 2789.49,3169.76 C4.2 2784.25,3236.22 C3.1 ; v1(3015,3590) 2985,3590 2906,3511 2806,3511 2797.8,3502.8 U1.5 2797.8,3324.25 2770.47,3296.93 C3.1 ; R1.2 C3.1
  Bottom Layer w10: R3.2 2105,3350 2105,3468.9 2084.54,3489.36 2070.64,3489.36 2055,3505 Q1.3 2152.5,3512.5 v1(2240,3600) ; U2.2 2773.78,3715.16 2774.02,3715.39 2814.61,3715.39 2814.84,3715.16 U2.9 2825.02,3705.02 U2.10 ; v1(2795,3100) 2795,2720 2880,2635 3195,2635 BT1.+ ; U2.10 2853.17,3695.47 2866.95,3709.25 C1.2 2938.01,3709.25 2954.67,3692.6 2993.35,3692.6 C2.1 3015,3670.94 v1(3015,3590)
/RST: C12.1 J1.3 R1.1 SW1.1 SW1.2 U1.4 | length 1707.4
  Top Layer w10: R1.1 2455,3250 J1.3 2255,3035.13 2279.66,3010.47 2279.66,2995.34 2290,2985 2515,2985 2553.48,3023.48 SW1.1 ; v1(2675,3100) 2675,3097.29 2670,3092.29 2670,3024.04 SW1.1 ; v1(2675,3280) 2717.87,3280 2769.13,3331.26 2769.13,3368.94 U1.4 ; C12.1 3006.52,3017.51 SW1.2 SW1.1
  Bottom Layer w10: v1(2675,3100) v1(2675,3280)
GND: BT1.- C1.1 C2.2 C3.2 C4.1 C5.2 C6.2 C8.1 C9.1 C10.2 C11.2 C12.2 C13.1 C14.1 J1.4 Q2.2 R4.2 SW1.3 SW1.4 SW1.5 U1.6 U2.3 U2.5 U2.6 U2.7 U2.8 U3.2 | length 1876.4
  Top Layer w10: v1(1769.87,3631.9) 1770,3632.03 C8.1 ; v1(1805,3480) 1806.91,3478.09 1854.67,3478.09 U3.2 ; R4.2 v1(2040,3585) ; C5.2 2068.62,3165 2073.47,3160.16 2073.47,3151.53 v1(2095,3130) ; C6.2 2335,3450 2335.61,3449.39 v1(2335.9,3449.39) ; C9.1 2363.87,3716.57 2367.29,3720 v1(2370,3720) 2420.47,3720 C10.2 2494.53,3724.53 v1(2495,3725) 2496.91,3723.09 2507.66,3723.09 C11.2 ; SW1.3 2670.96,2845 v1(2845,2845) 2846.52,2846.52 SW1.4 2997.93,2849.13 SW1.5 3008.65,2935 3026.14,2952.49 C12.2 ; C4.1 2840.48,3199.74 v1(2857.69,3199.74) 2855.77,3201.65 2855.77,3217.85 2829.53,3244.09 C3.2 2825,3254.53 v1(2825,3305) 2823.39,3306.61 U1.6 ; C13.1 v1(3131.57,3350.79) 3131.57,3286.58 C14.1
  Bottom Layer w10: v1(1769.87,3631.9) 1816.77,3585 v1(2040,3585) ; U2.3 2784.99,3734.84 ; U2.5 2785.15,3735.01 2784.99,3734.84 ; U2.6 2804.84,3735.01 2805.01,3734.84 ; U2.7 U2.8 ; C1.1 2831.26,3740.75 2825.35,3734.84 U2.8 ; 2784.99,3734.84 2805.01,3734.84 ; 2805.01,3734.84 U2.8
I2C_SCL: R6.1 U1.15 U2.1 | length 304.3
  Top Layer w10: R6.1 2632.76,3503.7 2658.74,3503.7 2717.95,3562.92 2717.95,3594.92 U1.15 2721.02,3686.02 2725,3690 v1(2725,3695)
  Bottom Layer w10: v1(2725,3695) 2725.39,3695.39 2764.9,3695.39 U2.1
I2C_SDA: R7.1 U1.16 U2.4 | length 315.8
  Top Layer w10: R7.1 2692.36,3575 2695.43,3578.07 U1.16 2695.43,3737.73 2710,3752.29 v1(2710,3755)
  Bottom Layer w10: v1(2710,3755) 2739.4,3755 2739.87,3754.53 U2.4
INT1: U1.14 U2.12 | length 113
  Top Layer w10: U1.14 2746.61,3638.15 v1(2766.84,3658.38)
  Bottom Layer w10: v1(2766.84,3658.38) 2785.08,3676.61 2785.08,3694.9 U2.12
INT2: U1.11 U2.11 | length 106
  Top Layer w10: U1.11 2824.19,3598.8 2824.19,3659.19 v1(2825,3660)
  Bottom Layer w10: U2.11 2804.84,3680.16 v1(2825,3660)
NetAE1_1: AE1.1 C8.2 L1.2 | length 440
  Top Layer w21.05: AE1.1 1545,3855 1623.11,3855 1770,3708.11 1770,3706.87 1771.68,3705.19 1806.25,3705.19 1818.58,3692.86 1818.58,3655.89 1830.91,3643.56 1857.87,3643.56 L1.2
NetC5_1: C5.1 U3.4 Y1.1 | length 548.5
  Top Layer w10: U3.4 2091.38,3437.6 2110,3418.98 2110,3325 2100,3315 1992.99,3315 Y1.1 2023.35,3274.65 C5.1 C5.1@2024.17,3165.83
NetC6_1: C6.1 U3.5 Y1.2 | length 647.9
  Top Layer w10: U3.5 2095,3475 2235,3335 2235,3315.86 2240.86,3310 Y1.2@2293.11,3310 ; C6.1 2248.35,3354.76 Y1.2@2293.11,3310 ; Y1.2 Y1.2@2293.11,3310
NetC7_2: C7.2 L1.1 | length 102.2
  Top Layer w21.05: L1.1 1865,3694.53 1880.08,3709.61 C7.2
NetL2_2: L2.2 R5.1 | length 92.4
  Top Layer w21.05: L2.2 2206.53,3690 2212.28,3695.75 R5.1
NetQ1_2: Q1.2 Q2.3 R3.1 | length 248.2
  Bottom Layer w10: Q2.3 2015.32,3485 2035.32,3465 Q1.2 2035.32,3450 2044.25,3441.06 2044.25,3320.75 R3.1
NetQ2_1: Q2.1 R2.2 | length 75.8
  Bottom Layer w10: Q2.1 1865,3446.97 1865,3420 1884.25,3400.75 R2.2
PAOUT: C7.1 L2.1 U3.1 | length 324.6
  Top Layer w21.05: U3.1 1866.61,3512.4 1960,3605.79 C7.1 2055.56,3660.39 2065.02,3669.85 L2.1
RADIO_TX: pad.4 R4.1 U1.10 U3.6 | length 1281.6
  Top Layer w10: U3.6 1955.63,3515.78 2036.62,3515.78 R4.1 2231.46,3519.17 2247.29,3535 v1(2250,3535) ; v1(2850,3535) 2850,3540 2848.98,3541.02 U1.10 2850.84,3599.85 2850.84,3640.84 2895,3685 pad.4
  Bottom Layer w10: v1(2250,3535) v1(2850,3535)
RF_PWR: R2.1 U1.13 | length 1152.5
  Top Layer w10: v1(2730,3445) 2772.2,3487.2 U1.13
  Bottom Layer w10: R2.1 2085.75,3210 2280,3210 2515,3445 v1(2730,3445)
RF_VDD: Q1.1 U3.3 | length 324.8
  Top Layer w10: U3.3@1841.1,3429.8 U3.3@1848.9,3437.6 ; U3.3 1866.61,3437.6 1924.21,3380 v1(2075,3380)
  Bottom Layer w10: Q1.1 2074.69,3385.31 v1@2075,3385
TEST: J1.2 U1.3 | length 546.3
  Top Layer w10: J1.2 v1(2490,3185) ; v1(2620,3280) 2650,3310 2721,3310 2745.31,3334.31 2745.31,3370.7 U1.3
  Bottom Layer w10: v1(2490,3185) 2525,3185 v1(2620,3280)
XIN: C13.2 U1.7 Y2.1 | length 287.7
  Top Layer w10: U1.7 2847.94,3373.05 2847.94,3412.06 2853.79,3417.91 2887.68,3417.91 2906.38,3399.21 Y2.1 2980.79,3415 C13.2
XOUT: C14.2 U1.8 Y2.2 | length 277.5
  Top Layer w10: U1.8 2874.57,3310.43 2884.21,3300.79 Y2.2 3064.21,3300.79 C14.2
pads on no net: AE1.2 U1.1 U1.2 U1.9 U1.12
copper on no net:
  other v2: 3145,2830 1885,3155 3200,3710

## Polygon pours and split planes (outlines as drawn)
GND on Bottom Layer "GND_L02_P000" (solid, remove dead copper, pour order 0): 1757.48,2305 3377.48,2305 3377.48,3910 1757.48,3910

## Other copper
Multi-Layer:
  lines w10: 1345,2270 3395,2270 3395,3935 1345,3935 1345,2270

## Silkscreen, mask and mechanical layers (free items; w line width, h text height)
Top Overlay:
  text "RF TX" at 2965,3865 h30 r180
  text "GND" at 2170,3100 h30 r90
  text "RST" at 2270,3100 h30 r90
  text "3v3" at 2470,3100 h30 r90
  text "TEST" at 2370,3095 h30 r90
  text "Beanbag Board" at 2240,2506.66 h50
  text "E. Eidt - Aug. '22" at 2225,2433.33 h40